# Altium PCB DIP2350.PcbDoc (part 2 of 2)
Units mm, origin at the board's own origin, x right, y up, seen from the top; angles counter-clockwise.
Board outline 25.4 x 81.28 mm, 4 copper layers (Top Layer, Layer 1, Layer 2, Bottom Layer), stack 1.586 mm thick; 85 components, 93 nets, 372 pads, 127 vias.
Unrouted connection lines stored in the file: 5.
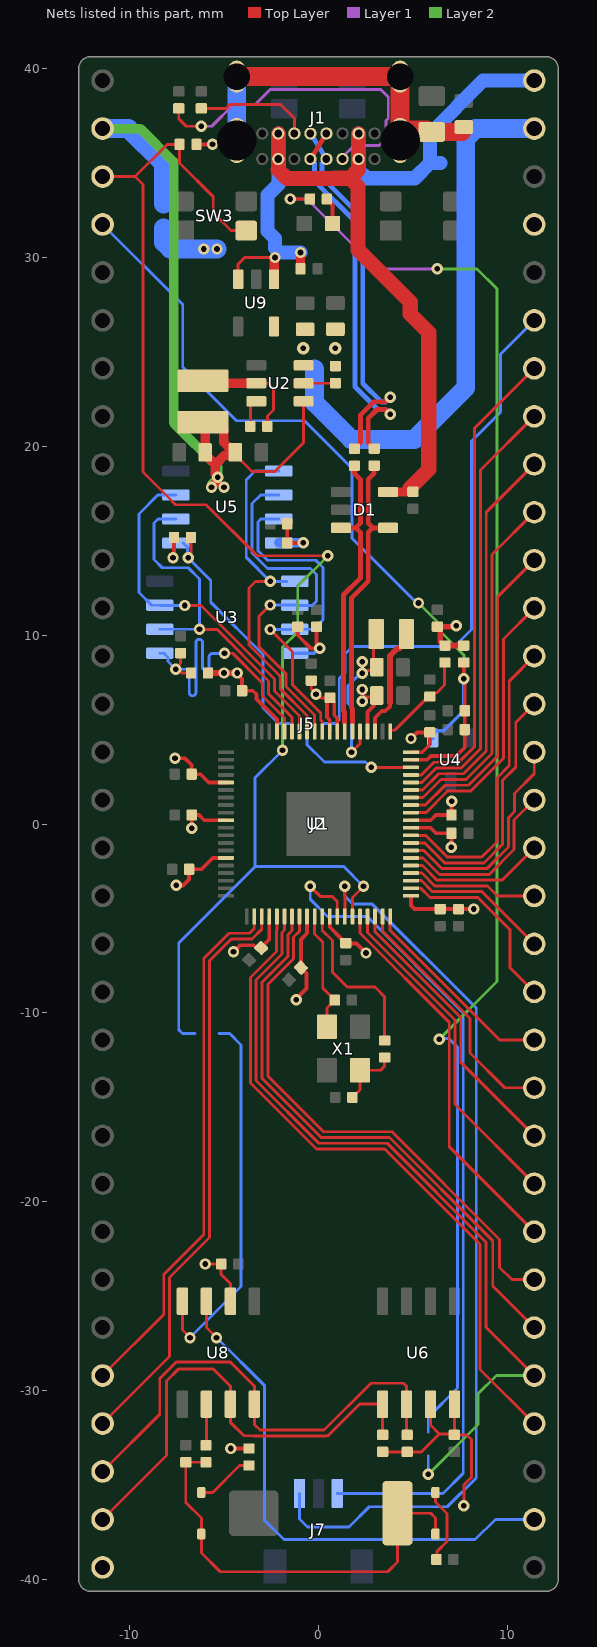
[diagram p4: the nets of this part, all layers, seen from the top]

## Via types
v1: diameter 0.6, hole 0.3, Top Layer to Bottom Layer, tented both sides, 116 vias
v2: diameter 0.6, hole 0.3, Top Layer to Bottom Layer, 9 vias
v3: diameter 0.66, hole 0.3, Top Layer to Bottom Layer, tented both sides, 2 vias

## Nets (pads, with @x,y where several pads share a name; then routed paths per layer and width w, separated by ;. In a path a pad name is that pad's centre, name@x,y a point inside that pad or via, vN(x,y) a via of type N, cw(c..) or ccw(c..) an arc to the next point about the centre after c; other vN are vias at no path point) (continued)
GP22: J2.28 U1.22 | length 28.3
  Top Layer w0.152: J2.28@-11.43,-29.21 -8.191,-25.971 -8.191,-23.862 -6.071,-21.742 -6.071,-7.115 -4.744,-5.788 -3.647,-5.788 -3.4,-5.542 U1.22@-3.4,-4.9
GP23: J2.29 U1.23 | length 31
  Top Layer w0.152: J2.29@-11.43,-31.75 -7.886,-28.206 -7.886,-24.017 -5.766,-21.897 -5.766,-17.65 -5.766,-7.242 -4.618,-6.093 -3.52,-6.093 -3,-5.573 U1.23@-3,-4.9
GP24: J2.36 U1.25 | length 35.8
  Top Layer w0.152: U1.25@-2.2,-4.9 -2.2,-5.586 -2.228,-5.614 -2.228,-6.753 -3.605,-8.129 -3.605,-12.497 -3.605,-13.717 -0.107,-17.214 3.514,-17.214 8.561,-22.261 8.561,-28.881 J2.36@11.43,-31.75
GP25: J2.37 J4.2 U1.26 | length 42.9
  Top Layer w0.152: U1.26@-1.8,-4.9 -1.8,-5.617 -1.923,-5.74 -1.923,-6.879 -3.3,-8.255 -3.3,-13.591 0.019,-16.91 3.641,-16.91 8.866,-22.134 8.866,-26.646 J2.37@11.43,-29.21
  Layer 2 w0.152: v1(5.817,-34.442) 8.458,-31.801 8.458,-30.175 9.423,-29.21 J2.37@11.43,-29.21
  Bottom Layer w0.152: v1(5.817,-34.442) J4.2@5.817,-33.477
GP26: J2.38 U1.27 | length 30.5
  Top Layer w0.152: U1.27@-1.4,-4.9 -1.4,-5.648 -1.619,-5.867 -1.619,-7.005 -2.995,-8.382 -2.995,-13.464 0.145,-16.605 3.767,-16.605 9.231,-22.069 9.231,-24.471 J2.38@11.43,-26.67
GP27: J2.39 U1.28 | length 28.6
  Top Layer w0.152: U1.28@-1,-4.9 -1,-5.679 -1.314,-5.993 -1.314,-7.131 -2.665,-8.482 -2.665,-13.364 0.272,-16.3 3.893,-16.3 9.597,-22.003 9.597,-23.48 10.246,-24.13 J2.39@11.43,-24.13
GP28: J2.40 U1.36 | length 20.5
  Top Layer w0.152: U1.36@2.2,-4.9 2.2,-5.771 6.929,-10.5 6.929,-17.089 J2.40@11.43,-21.59
GP29: J2.41 U1.37 | length 17.8
  Top Layer w0.152: U1.37@2.6,-4.9 2.6,-5.74 7.233,-10.374 7.233,-14.853 J2.41@11.43,-19.05
GP30: J2.42 U1.38 | length 15.1
  Top Layer w0.152: U1.38@3,-4.9 3,-5.709 7.538,-10.248 7.538,-12.618 J2.42@11.43,-16.51
GP31: J2.43 U1.39 | length 13.3
  Top Layer w0.152: U1.39@3.4,-4.9 3.4,-5.678 8.029,-10.307 8.029,-12.129 9.87,-13.97 J2.43@11.43,-13.97
GP32: J2.44 U1.40 | length 10.8
  Top Layer w0.152: U1.40@3.8,-4.9 3.8,-5.647 9.583,-11.43 J2.44@11.43,-11.43
GP33: J2.45 U1.42 | length 10
  Top Layer w0.152: U1.42@4.9,-3.4 5.42,-3.4 5.909,-3.889 8.435,-3.889 10.137,-5.591 10.137,-7.597 J2.45@11.43,-8.89
GP34: J2.46 U1.43 | length 7.9
  Top Layer w0.152: U1.43@4.9,-3 5.451,-3 6.036,-3.585 8.665,-3.585 J2.46@11.43,-6.35
GP35: J2.47 U1.44 | length 7.1
  Top Layer w0.152: U1.44@4.9,-2.6 5.482,-2.6 6.162,-3.28 8.961,-3.28 9.491,-3.81 J2.47@11.43,-3.81 J2.47@11.319,-3.81
GP36: J2.48 U1.45 | length 7.6
  Top Layer w0.152: U1.45@4.9,-2.2 5.513,-2.2 6.288,-2.975 9.725,-2.975 J2.48@11.43,-1.27
GP37: J2.49 U1.46 | length 9.4
  Top Layer w0.152: U1.46@4.9,-1.8 5.544,-1.8 6.414,-2.67 9.042,-2.67 10.365,-1.347 10.365,0.205 J2.49@11.43,1.27
GP38: J2.50 U1.47 | length 11.6
  Top Layer w0.152: U1.47@4.9,-1.4 5.575,-1.4 6.541,-2.365 8.916,-2.365 10.061,-1.221 10.061,0.332 10.386,0.657 10.386,1.613 11.43,2.657 J2.50@11.43,3.81
GP39: J2.51 U1.48 | length 13.8
  Top Layer w0.152: U1.48@4.9,-1 5.634,-1 6.693,-2.059 8.772,-2.059 9.756,-1.075 9.756,2.313 10.449,3.007 10.449,5.369 J2.51@11.43,6.35
GP40: J2.52 U1.49 | length 16
  Top Layer w0.152: U1.49@4.9,-0.6 5.665,-0.6 6.819,-1.754 8.646,-1.754 9.451,-0.949 9.451,2.44 10.104,3.093 10.104,7.564 J2.52@11.43,8.89
GP41: J2.53 U1.52 | length 14.7
  Top Layer w0.152: U1.52@4.9,0.6 5.692,0.6 6.839,1.747 8.067,1.747 9.8,3.48 9.8,9.8 J2.53@11.43,11.43
GP42: J2.54 U1.53 | length 16.8
  Top Layer w0.152: U1.53@4.9,1 5.661,1 6.713,2.052 7.941,2.052 9.495,3.606 9.495,12.035 J2.54@11.43,13.97
GP43: J2.55 U1.54 | length 19
  Top Layer w0.152: U1.54@4.9,1.4 5.538,1.4 6.495,2.357 7.815,2.357 9.19,3.732 9.19,14.27 J2.55@11.43,16.51
GP44: J2.56 U1.55 | length 21.1
  Top Layer w0.152: U1.55@4.9,1.8 5.507,1.8 6.369,2.662 7.689,2.662 8.885,3.858 8.885,16.505 J2.56@11.43,19.05
GP45: J2.57 U1.56 | length 23.2
  Top Layer w0.152: U1.56@4.9,2.2 5.476,2.2 6.242,2.967 7.562,2.967 8.58,3.985 8.58,18.74 J2.57@11.43,21.59
GP46: J2.58 U1.57 | length 25.3
  Top Layer w0.152: U1.57@4.9,2.6 5.445,2.6 6.116,3.271 7.436,3.271 8.276,4.111 8.276,6.076 8.276,20.76 8.276,20.976 J2.58@11.43,24.13
GP47: J2.59 J5.1 | length 29.4
  Bottom Layer w0.152: J5.1@0.33,5.328 0.902,5.328 1.1,5.526 1.1,7.7 1.4,8 1.4,9 1.8,9.4 7.2,9.4 8.1,10.3 8.1,20.27 9.639,21.81 9.639,24.879 J2.59@11.43,26.67
NetC3_1: C3.1 L1.1 U2.5 | length 6.1
  Top Layer w0.152: L1.1@-6.125,23.424 -6.04,23.339 L1.1@-4.849,23.339 ; U2.5@-3.286,23.339 -2.657,23.339 -2.38,23.062 -2.38,21.923 -2.703,21.599 C3.1@-2.703,21.053 C3.1@-2.703,21.078
  Top Layer w0.5: L1.1@-4.849,23.339 U2.5@-3.286,23.339
NetC3_2: C3.2 U2.6 | length 1.5
  Top Layer w0.152: C3.2@-3.603,21.053 -3.603,22.191 -3.405,22.389 U2.6@-3.286,22.389
NetC26_1: C26.1 R10.1 X1.3 | length 3.5
  Top Layer w0.152: C26.1@1.798,-14.481 1.798,-14.456 1.997,-14.257 2.022,-14.257 2.198,-14.082 X1.3@2.198,-13.04 3.297,-13.04 3.507,-12.83 R10.1@3.507,-12.366
NetC35_1: C35.1 D3.1 D4.1 K1.1 R17.2 | length 22.7
  Top Layer w0.152: C35.1@-7.025,-33.8 -7.025,-35.925 -6.2,-36.75 D3.1@-6.2,-37.6 -6.2,-38.6 -5.2,-39.6 3.675,-39.6 4.187,-39.087 K1.1@4.187,-36.5 5.95,-36.5 6.2,-36.75 D4.1@6.2,-37.6 ; C35.1@-6.975,-33.8 R17.2@-5.95,-33.8
NetD2_2: D2.2 R7.2 | length 1.4
  Top Layer w0.2: R7.2@0.45,33.1 0.45,33.075 0.625,32.9 0.633,32.9 0.75,32.783 D2.2@0.75,31.8
NetD3_2: D3.2 R18.1 | length 3.1
  Top Layer w0.152: D3.2@-6.2,-35.4 -5.6,-35.4 -4.175,-33.975 R18.1@-3.675,-33.975
NetD4_2: D4.2 R19.1 | length 4
  Top Layer w0.152: D4.2@6.2,-35.4 6.2,-35.901 6.806,-36.507 6.806,-37.994 6.29,-38.511 6.29,-38.91 R19.1@6.25,-38.95
NetJ1_A5: J1.A5 R2.1 | length 17.9
  Top Layer w0.152: R2.1@-7.4,37.9 -7.4,37.35 -7,36.95 v1(-6.2,36.95)
  Layer 1 w0.152: v1(-6.2,36.95) -5.65,36.95 -4.5,38.1 -3.35,38.1 -2.55,38.9 3.3,38.9 3.7,38.5 3.7,37.366 3.588,37.253 3.588,36.301 3.211,35.924 1.876,35.924 1.275,35.323 J1.A5@1.275,35.218
NetJ1_B5: J1.B5 R3.1 | length 6.3
  Top Layer w0.152: R3.1@-6.382,37.9 -4.9,37.9 -4.7,38.1 -2,38.1 -1.275,37.375 J1.B5@-1.275,36.568
NetJ4_1: J4.1 R7.1 | length 77.2
  Top Layer w0.152: v1(-1.5,33.1) R7.1@-0.45,33.1
  Layer 1 w0.152: v1(-1.5,33.1) -0.6,33.1 3.1,29.4 v1(6.3,29.4)
  Layer 2 w0.152: v1(6.3,29.4) 8.4,29.4 9.451,28.349 9.451,-8.349 v1(6.4,-11.4)
  Bottom Layer w0.152: J4.1@5.817,-32.207 5.817,-31.42 7.366,-29.87 7.366,-11.82 6.9,-11.354 6.446,-11.354 v1(6.4,-11.4)
NetJ5_2: J5.2 U1.58 | length 7.1
  Top Layer w0.152: v1(2.8,3) U1.58@4.9,3
  Bottom Layer w0.152: J5.2@-0.6,5.321 -0.6,4.2 0.322,3.278 2.487,3.278 2.765,3 v1(2.8,3)
NetJ6_2: J6.2 U8.4 | length 20.1
  Top Layer w0.152: U8.4@-7.205,-25.275 -7.205,-26.795 v1(-6.8,-27.2)
  Bottom Layer w0.152: v1(-6.8,-27.2) -4.1,-24.5 -4.1,-11.7 -4.7,-11.1 J6.2@-5.265,-11.1
NetJ7_1: J7.1 U1.33 | length 45.3
  Top Layer w0.152: v1(-0.432,-3.302) 0.097,-3.831 0.726,-3.831 1,-4.105 U1.33@1,-4.9
  Bottom Layer w0.152: v1(-0.432,-3.302) -0.432,-3.988 0.48,-4.9 1.598,-4.9 1.603,-4.905 2.584,-4.905 7.673,-9.994 7.673,-34.382 6.605,-35.45 J7.1@1,-35.45
NetJ7_3: J7.3 U1.34 | length 48.4
  Top Layer w0.152: v1(1.397,-3.302) 1.4,-3.305 U1.34@1.4,-4.9
  Bottom Layer w0.152: J7.3@-1,-35.45 -1,-36.8 -0.571,-37.229 1.621,-37.229 2.69,-36.16 6.825,-36.16 8.357,-34.628 8.357,-9.749 2.855,-4.247 1.828,-4.247 1.397,-3.816 v1(1.397,-3.302)
NetL2_2: L2.2 U1.63 | length 5.4
  Top Layer w0.2: U1.63@3,4.9 3,5.625 3.279,5.904 3.354,5.979 3.461,5.979 3.541,5.979 3.787,6.225 3.787,6.423
  Top Layer w0.3: 3.787,6.423 3.787,8.907 4.158,9.278 4.261,9.278 L2.2@4.511,9.528
NetR1_1: R1.1 U2.2 | length 1.7
  Top Layer w0.152: U2.2@-0.786,23.339 0.889,23.339 R1.1@0.9,23.35
P1V1: C27.1 C28.1 C29.1 C30.1 L2.1 U1.10 U1.32 U1.51 U1.65 | length 17
  Top Layer w0.152: v1(1.755,3.807) 2.2,4.252 U1.65@2.2,4.9 ; v1(2.325,7.975) 2.454,8.104 2.619,8.104 2.638,8.123 C30.1@2.772,8.123 ; L2.1@2.911,9.649 2.911,7.955 C30.1@2.944,7.922 ; L2.1@2.911,9.928 L2.1@2.944,9.894
  Top Layer w0.2: v1(-6.703,-0.232) -6.711,-0.225 C27.1@-6.711,0.479 -6.322,0.479 -6.043,0.2 U1.10@-4.9,0.2 ; U1.32@0.6,-4.9 0.6,-5.46 1.25,-6.11 1.25,-6.135 1.425,-6.31 C29.1@1.45,-6.31 ; C29.1@1.374,-6.335 2.016,-6.335 v1(2.517,-6.836) ; U1.51@4.9,0.2 5.946,0.2 6.225,0.479 C28.1@7.048,0.479 ; C28.1@7.049,0.48 v1@7.049,1.209
  Bottom Layer w0.152: v1(1.755,3.807) 1.755,6.209 1.552,6.412 1.552,7.312 2.215,7.975 v1(2.325,7.975)
  other v1: 7.052,1.213 2.325,8.6
P3V3: C6.1 C7.1 C8.1 C9.1 C10.1 C11.1 C12.1 C13.1 C14.1 C15.1 C16.1 C17.1 C19.1 C20.1 C21.1 C22.1 C24.1 C34.1 C39.1 J2.32 J2.61 J3.1 R8.2 R9.2 R11.1 R12.1 R13.1 R14.2 R16.2 R18.2 U1.5 U1.15 U1.24 U1.29 U1.41 U1.50 U1.60 U1.64 U1.68 U1.69 U1.76 U3.8 U5.8 U6.7 U6.8 U8.2 | length 72.5
  Top Layer w0.152: v1(-5.993,-23.3) C39.1@-5.15,-23.3 -5.15,-23.85 -4.665,-24.335 U8.2@-4.665,-25.275 ; C11.1@-0.379,7.596 -0.379,7.154 -0.125,6.9 v1(-0.125,6.877) -0.044,6.877 0.152,6.681 C8.1@0.612,6.681 ; v1(2.325,7.125) 2.357,7.093 2.357,6.879 2.513,6.723 2.898,6.723 C24.1@2.944,6.677 ; R12.1@3.4,-33.25 R13.1@4.7,-33.25 5.45,-33.25 6.4,-32.3 ; U6.7@5.935,-30.725 5.935,-31.835 6.4,-32.3 ; U6.8@7.205,-30.725 7.2,-30.73 C34.1@7.2,-32.35 ; v1(7.7,-36.1) 7.7,-35 8.1,-34.6 8.1,-32.6 7.85,-32.35 C34.1@7.2,-32.35 ; 6.4,-32.3 7.15,-32.3 C34.1@7.2,-32.35
  Top Layer w0.2: v1(-7.7,14.1) -7.65,14.15 R14.2@-7.65,15.175 ; v1(-7.592,3.477) -7.059,3.477 -6.711,3.128 C12.1@-6.711,2.638 -6.246,2.638 -5.808,2.2 U1.5@-4.9,2.2 ; v1(-7.529,-3.238) -7.503,-3.264 -7.173,-3.264 -6.85,-2.941 C13.1@-6.85,-2.4 -6.198,-2.4 -5.598,-1.8 U1.15@-4.9,-1.8 ; R9.2@-6.459,35.992 v1(-5.609,35.992) ; v1(-4.65,-33.075) R18.2@-3.675,-33.075 ; v1(-4.494,-6.76) v1@-4.484,-6.76 ; v1(-4.3,8) -4.3,7.939 -4.044,7.683 C7.1@-4.044,7.058 -3.475,7.058 -3.283,6.867 -3.283,6.638 -3.275,6.629 -3.275,6.622 -2.2,5.547 U1.76@-2.2,4.9 ; -4.163,-6.455 -4.468,-6.76 v1@-4.484,-6.76 ; C14.1@-3.083,-6.645 C14.1@-3.066,-6.662 ; C14.1@-3.032,-6.568 -3.28,-6.568 -3.426,-6.422 -4.146,-6.422 v1@-4.484,-6.76 ; C14.1@-2.956,-6.467 -2.6,-6.111 U1.24@-2.6,-4.9 ; C22.1@-1.65,15.9 C21.1@-1.651,14.884 C21.1@-1.651,14.884 -0.816,14.884 v1(-0.8,14.9) ; v1(-1.166,-9.3) -1.166,-9.249 -0.626,-8.709 -0.626,-7.908 C15.1@-0.924,-7.61 ; C19.1@-1.1,10.45 -1.092,10.442 -1.092,9.992 -0.4,9.3 v1(0.075,9.3) 0.075,9.408 -0.108,9.591 -0.108,10.442 C20.1@-0.1,10.45 ; C15.1@-0.907,-7.627 -0.942,-7.592 -0.942,-7.311 -0.924,-7.293 -0.924,-6.111 -0.6,-5.787 U1.29@-0.6,-4.9 ; U1.69@0.6,4.9 0.6,5.5 0.45,5.65 0.45,6.52 C8.1@0.612,6.681 0.637,6.681 0.812,6.506 0.812,6.481 0.838,6.456 0.838,5.762 1,5.6 U1.68@1,4.9 ; U1.64@2.6,4.9 2.6,5.936 2.944,6.281 C24.1@2.944,6.423 ; U1.41@4.9,-3.8 4.9,-4.317 5.089,-4.506 C17.1@7.416,-4.506 8.225,-4.506 v1(8.232,-4.499) ; U1.50@4.9,-0.2 5.939,-0.2 6.232,-0.492 7.042,-0.492 7.042,-1.222 v1(7.038,-1.225) ; U1.60@4.9,3.8 5.5,3.8 5.9,4.2 C9.1@5.9,4.85 5.217,4.85 4.9,4.533 v1(4.9,4.525)
  Top Layer w0.3: R8.2@-5.85,8 v1@-4.969,8 ; v1@-5.092,8 v1(-5,8) v1(-4.3,8) ; C10.1@6.3,10.45 C10.1@6.324,10.45 ; v1(7.3,10.5) 7.25,10.45 C10.1@6.324,10.45 ; R16.2@7.5,9.45 R11.1@6.7,9.45 6.675,9.45 6.449,9.676 6.449,10.325 C10.1@6.324,10.45
  Bottom Layer w0.2: U3.8@-1.251,9.042 -0.227,9.042 0.031,9.3 v1(0.075,9.3)
  Bottom Layer w0.5: U5.8@-2.101,14.884 -0.816,14.884 v1(-0.8,14.9)
  Bottom Layer w1: J3.1@-8.2,31.565 -8.2,30.8 -7.851,30.451 v1(-6.068,30.451) v1(-5.368,30.451)
  other v1: 2.325,6.5
P3V3OUT: C4.1 C5.1 J2.2 J3.2 L1.2 U2.1 | length 43.7
  Top Layer w0.152: C5.1@-4.537,19.682 -3.521,18.666 -2.315,18.666 -0.786,20.195 U2.1@-0.786,22.389
  Top Layer w0.5: v1(-5.662,17.828) -5.662,17.844 -5.345,18.16 -5.345,18.353 v1(-5.334,18.364) -5.334,18.38 -5.459,18.505 -5.459,19.033 ; C5.1@-4.537,19.757 -4.687,19.907 -4.708,19.907 -5.018,20.217 -5.018,20.924 -5.418,21.324 -6.125,21.324 -6,21.199 -6,19.553 -5.884,19.437 -5.863,19.437 -5.459,19.033 ; C5.1@-4.522,19.539 -4.956,19.539 -5.459,19.037 -5.459,19.033
  Layer 2 w0.5: J2.2@-11.43,36.83 -9.424,36.83 -7.669,35.074 -7.669,21.243 -5.334,18.908 v1(-5.334,18.364) -5.345,18.353 -5.345,18.303 -5.651,17.998 -5.651,17.839 v1(-5.662,17.828)
  Bottom Layer w1: J2.2@-11.43,36.83 -10.059,36.83 -8.2,34.971 J3.2@-8.2,32.835
  other v1: -5.004,17.831
P_N: J1.A7 J1.B7 R4.1 | length 20.3
  Top Layer w0.26: J1.A7@-0.425,35.218 J1.B7@0.425,36.568 ; R4.1@2.953,19.881 2.636,20.198 2.636,21.486 3.1,21.95 3.55,21.95 v1(3.8,21.7)
  Bottom Layer w0.26: J1.A7@-0.425,35.218 -0.212,35.005 -0.212,34.062 1.938,31.912 1.938,23.16 3.154,21.944 3.556,21.944 v1(3.8,21.7)
P_P: J1.A6 J1.B6 R5.1 | length 20.3
  Top Layer w0.26: R5.1@1.907,19.878 2.224,20.195 2.224,21.657 2.929,22.362 3.562,22.362 v1(3.8,22.6)
  Bottom Layer w0.26: J1.B6@-0.425,36.568 J1.A6@0.425,35.218 0.2,34.993 0.2,34.233 2.35,32.083 2.35,23.331 3.325,22.356 3.556,22.356 v1(3.8,22.6)
PSRAM: J5.3 R14.1 U5.1 | length 13.4
  Top Layer w0.152: v1(-6.9,14.1) -6.9,14.221 -6.75,14.371 R14.1@-6.75,15.175
  Bottom Layer w0.152: U5.1@-7.162,14.884 -6.939,14.661 -6.939,14.139 v1(-6.9,14.1) -5.7,12.9 -5.7,11.741 -2.939,8.98 -2.939,6.151 -2.103,5.315 J5.3@-1.53,5.315
QCLK: U1.71 U3.6 U5.6 | length 20.2
  Top Layer w0.152: v1(-2.55,11.6) -3.15,11 -3.15,9.386 -1.725,7.961 -1.725,7.949 -1.715,7.94 -1.715,7.289 -0.2,5.774 U1.71@-0.2,4.9
  Bottom Layer w0.152: v1(-2.55,11.6) -2.541,11.591 -1.156,11.591 -1.136,11.571 -0.329,11.571 -0.1,11.8 -0.1,13.221 -0.412,13.533 -2.701,13.533 -3.512,14.344 -3.512,16.967 -3.055,17.424 U5.6@-2.101,17.424
QSD0: U1.72 U3.5 U5.5 | length 18.8
  Top Layer w0.152: v1(-2.55,12.85) -3.324,12.85 -3.675,12.499 -3.675,9.48 -2.03,7.835 -2.03,7.823 -2.02,7.813 -2.02,7.289 -2.02,7.163 -0.6,5.743 U1.72@-0.6,4.9
  Bottom Layer w0.152: v1(-2.55,12.85) -3.825,14.125 -3.825,18.225 -3.356,18.694 U5.5@-2.101,18.694 ; v1(-2.55,12.85) U3.5@-1.674,12.851
QSD1: U1.74 U3.2 U5.2 | length 18.8
  Top Layer w0.152: v1(-6.297,10.309) -5.378,10.309 -2.65,7.581 -2.65,6.9 -1.4,5.65 U1.74@-1.4,4.9
  Bottom Layer w0.152: U3.2@-8.401,10.312 -8.399,10.311 -6.299,10.311 v1(-6.297,10.309) -6.297,12.972 -6.896,13.571 -8.27,13.571 -8.7,14.002 -8.7,15.947 -8.492,16.154 U5.2@-7.551,16.154
QSD2: U1.73 U3.3 U5.3 | length 18.9
  Top Layer w0.152: v1(-7.075,11.575) -6.213,11.575 -2.325,7.687 -2.325,7.037 -1,5.712 U1.73@-1,4.9
  Bottom Layer w0.152: U5.3@-7.551,17.424 -8.505,17.424 -9.507,16.422 -9.507,12.263 -8.826,11.582 U3.3@-8.401,11.582 -8.397,11.579 -7.079,11.579 v1(-7.075,11.575)
QSD3: U1.70 U3.7 U5.7 | length 18.8
  Top Layer w0.152: v1(-2.55,10.3) -1.368,9.118 -1.368,7.373 0.121,5.884 0.121,5.513 0.2,5.435 U1.70@0.2,4.9
  Bottom Layer w0.152: v1(-2.55,10.3) -2.544,10.306 -1.257,10.306 U3.7@-1.251,10.312 -0.262,10.312 0.246,10.82 0.246,13.579 -0.142,13.967 -2.703,13.967 -3.207,14.471 -3.207,16.002 -3.055,16.154 U5.7@-2.101,16.154
QSS: R6.2 R8.1 U1.75 U3.1 | length 17.8
  Top Layer w0.152: R6.2@-7.3,9.05 -7.3,8.508 -7.551,8.257 v1(-7.551,8.195) -7.448,8.195 -7.254,8 R8.1@-6.75,8 ; v1(-4.975,9.05) -4.966,9.041 -4.541,9.041 -2.955,7.455 -2.955,6.774 -1.8,5.619 U1.75@-1.8,4.9
  Bottom Layer w0.152: U3.1@-8.401,9.042 -8.185,9.042 -7.962,8.819 -7.962,8.603 -7.553,8.195 v1(-7.551,8.195) -7.449,8.195 -7.02,8.195 cw(c-7.02,8.018) -6.844,8.018 -6.844,6.966 ccw(c-6.668,6.966) -6.491,6.966 -6.491,9.604 cw(c-6.315,9.604) -6.139,9.604 -6.139,8.324 ccw(c-5.963,8.324) -5.787,8.324 -5.787,8.847 cw(c-5.61,8.847) -5.61,9.023 -5.062,9.023 -5.002,9.023 v1(-4.975,9.05)
RST: J2.3 J6.1 R9.1 SW3.2 U1.35 | length 76.1
  Top Layer w0.152: J2.3@-11.43,34.29 -9.71,34.29 ; SW3.2@-3.825,31.425 -4.629,31.425 -5.571,32.368 -5.571,33.219 -7.359,35.006 R9.1@-7.359,35.992 -8.008,35.992 -9.71,34.29 ; v1(0.5,14.2) 0.497,14.203 -3.243,14.203 -5.946,16.906 -7.562,16.906 -7.973,17.318 -9.294,18.638 -9.294,33.874 -9.71,34.29 ; U1.35@1.8,-4.9 1.8,-3.89 v1(2.388,-3.302)
  Layer 2 w0.152: v1(-1.9,3.9) -1.9,9.367 -1.092,10.175 -1.092,12.608 v1(0.5,14.2)
  Bottom Layer w0.152: J6.1@-6.535,-11.1 -7.2,-11.1 -7.4,-10.9 -7.4,-6.308 -3.353,-2.261 ; v1(-1.9,3.9) -3.353,2.447 -3.353,-2.261 ; v1(2.388,-3.302) 1.346,-2.261 -3.353,-2.261
RTCINT: J2.34 U8.3 | length 28
  Top Layer w0.152: U8.3@-5.935,-25.275 -5.935,-26.665 v1(-5.4,-27.2)
  Bottom Layer w0.152: v1(-5.4,-27.2) -2.847,-29.753 -2.847,-36.878 -1.825,-37.9 8.3,-37.9 9.37,-36.83 J2.34@11.43,-36.83
SCL: J2.30 R13.2 U6.6 U8.8 | length 26
  Top Layer w0.152: J2.30@-11.43,-34.29 -8.4,-31.26 -8.4,-29.369 -7.526,-28.495 -4.671,-28.495 -3.395,-29.771 U8.8@-3.395,-30.725 -3.395,-31.805 -3.1,-32.1 0.3,-32.1 2.781,-29.619 4.508,-29.619 4.661,-29.771 4.661,-30.721 U6.6@4.665,-30.725 4.665,-32.315 R13.2@4.7,-32.35
SDA: J2.31 R12.2 U6.5 U8.7 | length 25.3
  Top Layer w0.152: J2.31@-11.43,-36.83 -8.05,-33.45 -8.05,-29.502 -7.419,-28.871 -5.565,-28.871 -4.665,-29.771 U8.7@-4.665,-30.725 -4.665,-31.679 -3.944,-32.4 -3.437,-32.4 -3.432,-32.405 0.426,-32.405 0.431,-32.4 0.5,-32.4 2.175,-30.725 U6.5@3.395,-30.725 ; U6.5@3.395,-30.73 3.395,-32.345 R12.2@3.4,-32.35
SHLD: C33.1 J1.1 J1.2 J1.3 J1.4 R15.1 | length 18.5
  Top Layer w0.152: R15.1@7.697,37.153 R15.1@7.7,37.15
  Top Layer w0.945: C33.1@6,36.65 R15.1@7.612,36.65
  Top Layer w1: J1.4@-4.325,39.578 J1.3@4.325,39.578 J1.1@4.325,36.719 ; J1.1@4.325,36.198 J1.1@4.325,36.719 ; C33.1@5.754,36.769 4.375,36.769 J1.1@4.325,36.719
  Bottom Layer w1: J1.2@-4.325,36.198 J1.4@-4.325,39.578
U_N: D1.4 R4.2 U1.66 | length 15.1
  Top Layer w0.26: 1.8,5.375 1.8,6.106 1.743,6.163 1.743,7.708 1.743,11.96 2.636,12.854 2.636,15.443 2.878,15.684 ; R4.2@2.953,18.981 2.953,18.576 2.636,18.259 2.636,15.925 2.878,15.684 ; D1.4@3.691,15.684 2.878,15.684
U_P: D1.3 R5.2 U1.67 | length 15.3
  Top Layer w0.26: D1.3@1.191,15.684 1.983,15.684 ; 1.331,9.238 1.331,9.067 ; 1.388,5.375 1.388,5.935 1.331,5.992 1.331,6.538 1.331,9.067 ; R5.2@1.907,18.978 1.907,18.573 2.224,18.256 2.224,15.925 1.983,15.684 ; 1.331,9.067 1.331,12.131 2.224,13.024 2.224,15.443 1.983,15.684
VBAT: R17.1 U8.6 | length 2.2
  Top Layer w0.152: R17.1@-5.985,-32.9 -5.935,-32.85 U8.6@-5.935,-30.725
VBUS: C32.1 C40.1 D1.5 J1.A4 J1.A9 J1.B4 J1.B9 J2.64 J8.2 U9.1 U9.3 | length 56.2
  Top Layer w0.152: U9.3@-4.25,28.85 -4.25,29.65 -3.9,30 v1(-2.3,30)
  Top Layer w0.5: U9.1@-2.35,28.85 -2.35,29.923 -2.3,29.973 v1(-2.3,30) ; v1(-0.952,30.263) -0.95,30.26 C40.1@-0.95,29.4 ; D1.5@3.691,17.584 4.661,17.584 C32.1@4.863,17.786
  Top Layer w0.745: -2.125,34.646 J1.A9@-2.125,35.218 J1.B4@-2.125,36.568 ; 2.125,34.827 J1.A4@2.125,35.218 J1.B9@2.125,36.568
  Top Layer w0.8: -2.125,34.646 -1.668,34.188 0.852,34.188 0.86,34.196 1.656,34.196 ; 2.125,34.827 2.125,34.665 1.656,34.196 ; C32.1@4.863,17.786 5.844,18.767 5.844,26.036 5.527,26.353 4.863,27.017 4.863,27.637 2.105,30.395 2.105,33.748 1.656,34.196
  Bottom Layer w0.745: J1.B4@-2.125,36.568 J1.A9@-2.125,35.218 -2.125,34.866 -2.1,34.841 -2.1,33.9 -2.7,33.3 -2.7,31.4 -2.3,31 -2.3,30.5 -2.063,30.263 v1(-0.952,30.263) ; J1.B9@2.125,36.568 J1.A4@2.125,35.218 2.125,34.637 2.562,34.2 5.1,34.2 5.9,35 ; J8.2@6.465,35 5.9,35 ; J2.64@11.43,39.37 8.72,39.37 5.9,36.55 5.9,35
VRA: C23.1 R11.2 U1.61 | length 5.1
  Top Layer w0.152: U1.61@3.8,4.9 3.8,4.939 3.824,4.963 4.039,4.963 5.628,6.551 5.726,6.551 6.124,6.949 6.272,6.949 6.681,7.357 6.681,8.531 R11.2@6.7,8.55
VREF: C18.1 C31.1 J2.4 R16.1 U1.59 U4.1 | length 45.9
  Top Layer w0.2: U1.59@4.9,3.4 5.755,3.4 5.955,3.6 7.3,3.6 7.75,4.05 7.75,4.549 7.75,4.9 7.75,5.549 7.75,5.8 7.75,7.65 v1(7.7,7.7) ; R16.1@7.7,8.55 v1@7.7,7.802 ; v1(7.7,7.7) v1@7.7,7.802 ; v1(7.7,7.7) v1@7.7,7.802
  Layer 2 w0.152: v1(5.3,11.7) 6.3,10.7 6.3,10.35 7.7,8.95 v1(7.7,7.7)
  Bottom Layer w0.152: J2.4@-11.43,31.75 -7.186,27.506 -7.186,24.203 -4.341,21.358 -0.734,21.358 1.78,18.844 1.78,15.131 5.211,11.7 v1(5.3,11.7)
  Bottom Layer w0.2: U4.1@6.05,4.55 6.05,4.74 6.25,4.94 6.64,4.94 7.7,6 v1(7.7,7.7)
VSYS: C1.1 C2.1 J2.63 J8.1 R1.2 U2.3 U9.5 | length 28.8
  Bottom Layer w1: -0.2,24.1 -0.2,22.3 1.729,20.371 5.08,20.371 7.8,23.091 7.8,36.3 8.33,36.83 J2.63@11.43,36.83
  other v3: -0.8,25.2 0.9,25.2
XIN: C25.1 U1.30 X1.1 | length 6.5
  Top Layer w0.152: U1.30@-0.2,-4.9 -0.2,-5.821 0.231,-6.252 0.231,-8.683 0.649,-9.101 0.674,-9.101 0.873,-9.3 C25.1@0.873,-9.325 0.873,-9.35 0.674,-9.549 0.649,-9.549 0.448,-9.75 X1.1@0.448,-10.74
XOUT: R10.2 U1.31 | length 8.8
  Top Layer w0.152: U1.31@0.2,-4.9 0.2,-5.637 0.739,-6.175 0.739,-7.852 1.526,-8.639 2.999,-8.639 3.507,-9.148 R10.2@3.507,-11.466
pads on no net: D1.1 J1.A8 J1.B8 J7.MP1 J7.MP2 SW1.1 SW1.4 SW2.1 SW2.3 SW3.1 SW3.3 U8.1 U9.4

## Polygon pours and split planes (outlines as drawn)
P3V3 on Layer 2 "P3V3_L03_P003" (solid, remove dead copper, pour order 3): 13.1,41.1 -13.3,41.1 -13.3,-41.1 13.1,-41.1 13.1,40.8
P1V1 on Layer 2 "P1V1_L03_P002" (solid, pour order 2): 2.4,7.6 1.9,7.6 1.2,6.9 1.2,3.1 2.7,1.6 7.2,1.6 7.4,1.4 7.4,0.9 3.8,-2.7 3.8,-6.1 2.8,-7.1 1.5,-7.1 -0.7,-4.9 -3.1,-4.9 -7.1,-0.9 -7.1,0 -4.7,2.4 -1.3,2.4 0.3,4 0.3,7.6 1.6,8.9 2.4,8.9 2.6,8.7 2.6,7.8
GND on Layer 2 "GND_L03_P001" (solid, pour order 1): -1.8,38.5 -3.4,36.9 -3.4,34.6 -1.5,32.7 0.3,32.7 0.6,32.4 0.6,22.6 2.3,20.9 4.7,20.9 5.1,21.3 5.1,22.8 4.5,23.4 3.775,23.4 2.9,24.275 2.9,33.1 3.6,33.8 3.6,36.9 2,38.5
GND on Layer 1 "GND_L02_P000" (solid, pour order 0): 12.855,-40.796 -12.85,-40.796 -12.85,40.789 12.829,40.789 12.829,-40.719 12.804,-40.719
GND on Top Layer "GND_L01_P004" (solid, remove dead copper, pour order 4): -13.3,41.1 13.1,41.1 13.1,-41.2 -13.2,-41.2 -13.2,-29.1
GND on Bottom Layer "GND_L04_P005" (solid, remove dead copper, pour order 5): -13.3,41.1 13.1,41.1 13.1,-41.2 -13.2,-41.2 -13.2,-29.1

## Keep-outs
Top Layer:
  rectangle: 3.65,9.25 4.15,11
  region: -0.4,-5.7 -0.4,-5.95 0.2,-6.55 0.2,-9.4 -0.2,-9.8 -0.2,-12.739 -0.1,-12.839 -0.1,-14.1 0.756,-14.956 2.844,-14.956 3.9,-13.9 3.9,-9.4 3,-8.5 1.6,-8.5 1.1,-8 1.1,-6.2 0.6,-5.7
Keep-Out Layer:
  the board outline again, w0.05

## Other copper
Top Layer:
  region net VSYS: 0.9,26.4 -1.531,26.4 -1.831,26.7 -2.4,26.7 -2.4,25 -1.689,24.289 0.861,24.289 0.9,24.25 1.1,24.45 1.1,26.058 1.132,26.09
  region net P3V3OUT: -5.944,17.678 -5.791,17.526 -4.877,17.526 -4.724,17.678 -4.724,18.754 -4.157,19.321 -4.157,19.778 -4.801,20.422 -4.801,20.789 -4.891,20.879 -6.172,20.879 -6.172,19.746 -6.096,19.228 -5.944,19.228
  region net P1V1: 3.097,7.808 2.964,7.675 2.175,7.675 2.025,7.825 2.025,8.95 2.155,9.08 2.431,9.08 2.695,9.344 3.304,9.344 3.304,8.32 3.287,8.303
  region net P3V3: 3.097,7.299 2.906,7.49 2.165,7.49 2.025,7.35 2.025,6.28 2.6,5.705 2.6,5.936 3.097,6.433 3.097,6.804
Layer 1:
  rectangle net P1V1: 2.1,7.875 2.55,8.575
  rectangle net P3V3: 2.1,6.4 2.55,7.1
Layer 2:
  region net P3V3OUT: -5.944,18.444 -5.944,17.678 -5.791,17.526 -4.877,17.526 -4.724,17.678 -4.724,20.295 -6.604,22.174 -6.909,22.479 -6.909,35.992 -8.636,37.719 -11.43,37.719 -11.43,35.941 -9.906,34.417 -9.906,22.406
Bottom Layer:
  rectangle net P1V1: 2.1,7.875 2.55,8.575
  rectangle net P3V3: 2.1,6.4 2.55,7.1
  rectangle net P3V3OUT: -5.6,17.7 -5.1,18.3
  region net P3V3OUT: -5.9,17.9 -5.9,17.939 cw(c-5.396,17.939) -5.396,18.443 -5.343,18.443 cw(c-5.343,17.9) -4.8,17.9
  region net VSYS: -0.2,23.339 1.3,24.839 1.3,25.5 1.1,25.7 -1,25.7 -1.2,25.5 -1.2,24.4 -0.6,23.8

## Silkscreen, mask and mechanical layers (free items; w line width, h text height)
Top Overlay:
  drawing of 598 lines, arcs and shapes, not listed
  text "GND" at -10.668,38.481 h1.2
  text "BUS" at 8.686,38.47 h1.2
  text "3V3 / OUT" at -10.668,35.93 h1
  text "SYS" at 8.702,35.93 h1.2
  text "RST" at -10.668,33.39 h1.4
  text "BOOT" at 8,33.39 h1.4
  text "REF" at -10.668,30.85 h1.2
  text "3V3" at 8.702,30.85 h1.2
  text "GND" at -10.668,28.31 h1.2
  text "GND" at 8.702,28.31 h1.2
  text "0" at -10.668,25.77 h1.8
  text "47" at 8.702,25.77 h1.8
  text "1" at -10.668,23.23 h1.8
  text "46" at 8.702,23.23 h1.8
  text "2" at -10.668,20.69 h1.8
  text "45" at 8.702,20.69 h1.8
  text "3" at -10.668,18.15 h1.8
  text "44" at 8.702,18.15 h1.8
  text "4" at -10.668,15.61 h1.8
  text "43" at 8.702,15.61 h1.8
  text "5" at -10.668,13.07 h1.8
  text "42" at 8.702,13.07 h1.8
  text "6" at -10.668,10.53 h1.8
  text "41" at 8.702,10.53 h1.8
  text "7" at -10.668,7.99 h1.8
  text "40" at 8.702,7.99 h1.8
  text "8" at -10.668,5.45 h1.8
  text "39" at 8.702,5.45 h1.8
  text "9" at -10.668,2.91 h1.8
  text "38" at 8.702,2.91 h1.8
  text "10" at -10.668,0.37 h1.8
  text "37" at 8.702,0.37 h1.8
  text "11" at -10.668,-2.17 h1.8
  text "36" at 8.702,-2.17 h1.8
  text "12" at -10.668,-4.71 h1.8
  text "35" at 8.702,-4.71 h1.8
  text "13" at -10.668,-7.25 h1.8
  text "34" at 8.702,-7.25 h1.8
  text "14" at -10.668,-9.79 h1.8
  text "33" at 8.702,-9.79 h1.8
  text "15" at -10.668,-12.33 h1.8
  text "32" at 8.702,-12.33 h1.8
  text "16" at -10.668,-14.87 h1.8
  text "31" at 8.702,-14.87 h1.8
  text "17" at -10.668,-17.41 h1.8
  text "30" at 8.702,-17.41 h1.8
  text "IP2350" at -1.052,-19.025 h4 r270
  text "18" at -10.668,-19.95 h1.8
  text "29" at 8.702,-19.95 h1.8
  text "19" at -10.668,-22.49 h1.8
  text "28" at 8.702,-22.49 h1.8
  text "20" at -10.668,-25.03 h1.8
  text "27" at 8.702,-25.03 h1.8
  text "21" at -10.668,-27.57 h1.8
  text "26" at 8.702,-27.57 h1.8
  text "22" at -10.602,-30.11 h1.8
  text "25" at 8.702,-30.11 h1.8
  text "23" at -10.602,-32.65 h1.8
  text "24" at 8.702,-32.65 h1.8
  text "SCL" at -10.602,-35.19 h1.2
  text "BAT" at 8.702,-35.19 h1.2
  text "SDA" at -10.602,-37.73 h1.2
  text "INT" at 8.702,-37.73 h1.2
  text "GND" at 8.702,-40.27 h1.2
  text "3V3" at -10.628,-40.3 h1.2
Bottom Overlay:
  circle w0.2: c5.817,-32.842 r1.204
  circle w0.2: c-5.9,-11.1 r1.204
  circle w0.2: c-8.2,32.2 r1.204
  circle w0.2: c7.1,35 r1.204
  region: -6.4,4.751 -6.4,6.23 -6.105,6.525 -1.465,6.525 -2.103,5.888 -2.103,5.024 -2.209,5.13 -2.262,5.13 -2.262,5.78 -6,5.78 -6,4.701
  region: 0,4.1 0.6,4.5 0.8,4.8 0.9,5.1 0.9,5.6 0.7,6 0.7,6.1 1.1,6.1 1.1,4.8 4.3,4.8 4.3,4.525 3.875,4.1 1.8,4.1
  region: 0.131,6.494 3.906,6.494 4.3,6.1 4.3,4.75 3.975,4.75 3.975,5.875 0.825,5.875 0.6,6.1 0.3,6.4
  region: -6.4,5.88 -6.4,4.4 -6.105,4.105 -1.465,4.105 -2.103,4.743 -2.103,5.606 -2.209,5.5 -2.262,5.5 -2.262,4.85 -6,4.85 -6,5.93
  region: 5.817,-31.542 2.917,-31.542 2.217,-32.242 2.217,-33.442 2.917,-34.142 5.817,-34.142 5.817,-34.042 5.317,-34.042 4.617,-33.342 2.417,-33.342 2.417,-32.342 4.617,-32.342 5.317,-31.642 5.817,-31.642
  region: -5.9,-9.8 -8.8,-9.8 -9.5,-10.5 -9.5,-11.7 -8.8,-12.4 -5.9,-12.4 -5.9,-12.3 -6.4,-12.3 -7.1,-11.6 -9.3,-11.6 -9.3,-10.6 -7.1,-10.6 -6.4,-9.9 -5.9,-9.9
  region: -8.2,30.9 -5.3,30.9 -4.6,31.6 -4.6,32.8 -5.3,33.5 -8.2,33.5 -8.2,33.4 -7.7,33.4 -7,32.7 -4.8,32.7 -4.8,31.7 -7,31.7 -7.7,31 -8.2,31
  region: 5.8,35 5.8,32.1 6.5,31.4 7.7,31.4 8.4,32.1 8.4,35 8.3,35 8.3,34.5 7.6,33.8 7.6,31.6 6.6,31.6 6.6,33.8 5.9,34.5 5.9,35
  lines w0.15: -6.4,6.225 -6.4,4.4 -6.105,4.105 -0.887,4.105 cw(c-0.887,5.321) -0.887,6.538 -1.562,6.538 -2,6.1 ; -6.394,6.225 -6.094,6.525 -1.395,6.525 ; -2.103,5.315 -2.1,5.9 -1.781,6.319 -1.224,6.538 ; -1.872,4.392 -2.103,4.743 ; -1.465,4.105 -1.644,4.284 -2.1,4.5 -2.181,4.581 -2.103,4.743 ; 3.875,4.1 -0.313,4.105 ccw(c-0.313,5.321) -0.313,6.538 3.862,6.538 4.3,6.1 4.3,4.525 3.9,4.125 ; -2.103,4.743 -2.1,5.1 -2.103,4.743
  text "USB" at 6.686,31.706 h1.6 r270
  text "3V3" at -4.8,31.6 h1.6
  text "PSRAM" at -2.276,4.911 h1.6
  text "GP47" at 3.856,4.911 h1.6
  text "RST" at -7.1,-11.636 h1.6
  text "LED" at 4.7,-33.366 h1.6
Mechanical 1:
  the board outline again, w0.05

## Text inside footprints (layer, text, board x,y; h text height)
D1: Top Assembly "1" at 0.666,17.259 h0.3
D2: Top Assembly "K" at -0.35,32.2 h0.5 r180
D3: Top Assembly "K" at -5.975,-37.895 h0.4 r90
D4: Top Assembly "K" at 6.425,-37.895 h0.4 r90
LOGO1: Bottom Overlay "0" at 8.563,-11.309 h5 r90; Bottom Overlay "PUBLIC / DOMAIN" at 9.013,-14.45 h2.5 r90
SW2: Top Assembly "1" at 3.25,30.9 h1
SW3: Top Assembly "1" at -7.75,30.9 h1
U2: Top Assembly "1" at -0.261,22.714 h0.3 r180
U3: Bottom Assembly "1" at -9.126,9.342 h0.3 r180
U5: Bottom Assembly "1" at -8.276,15.184 h0.3 r180
U6: Top Assembly "1" at 6.905,-24.55 h0.3 r270
U8: Top Assembly "1" at -3.695,-24.55 h0.3 r270
U9: Top Assembly "1" at -2.675,29.375 h0.3 r270